# EAGLE board PIR_D205_pan (EAGLE 7.1.0)
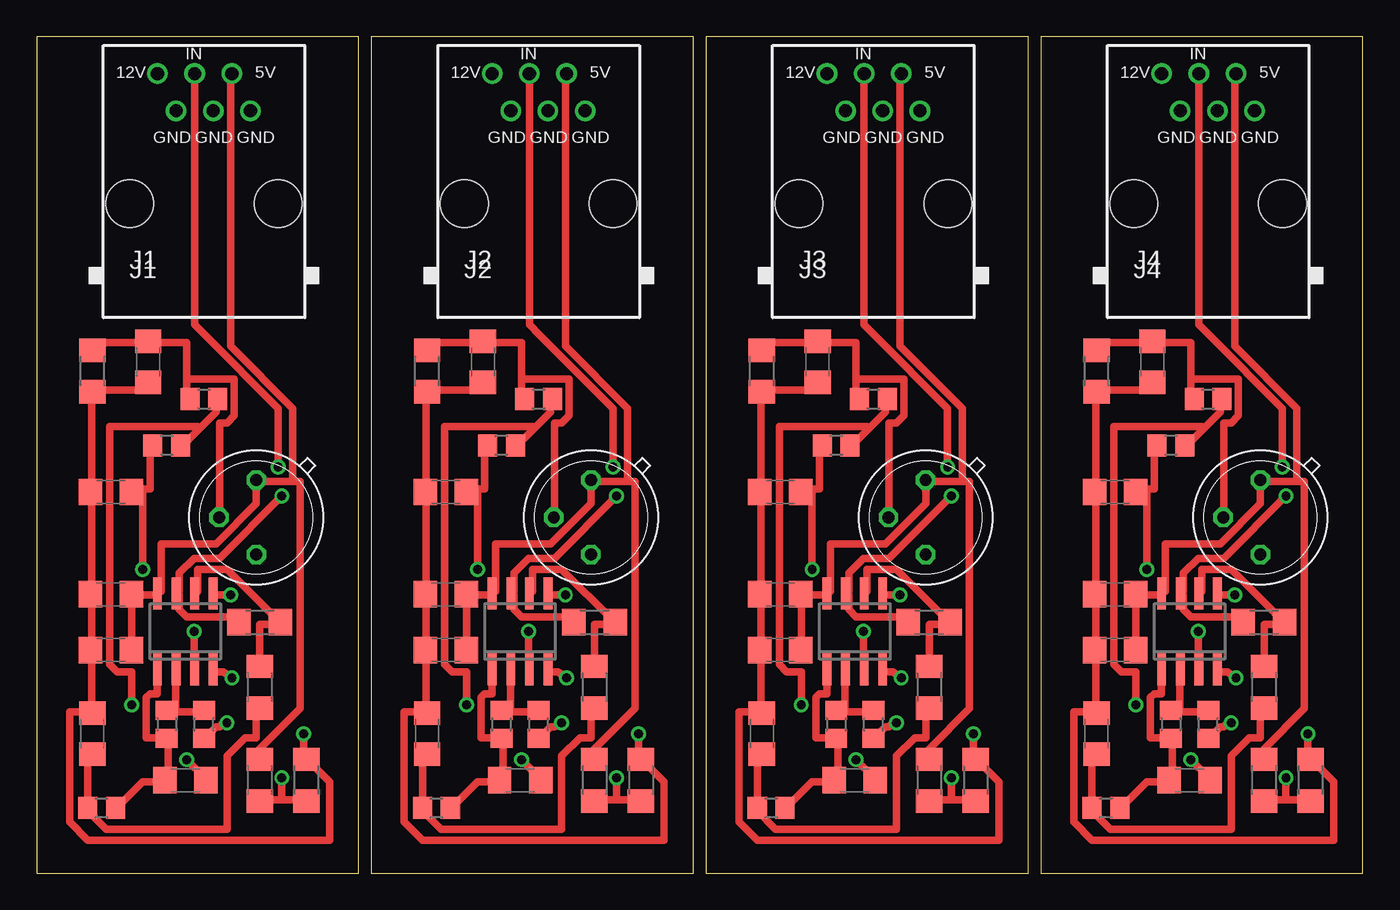
[diagram p0: board, top side]
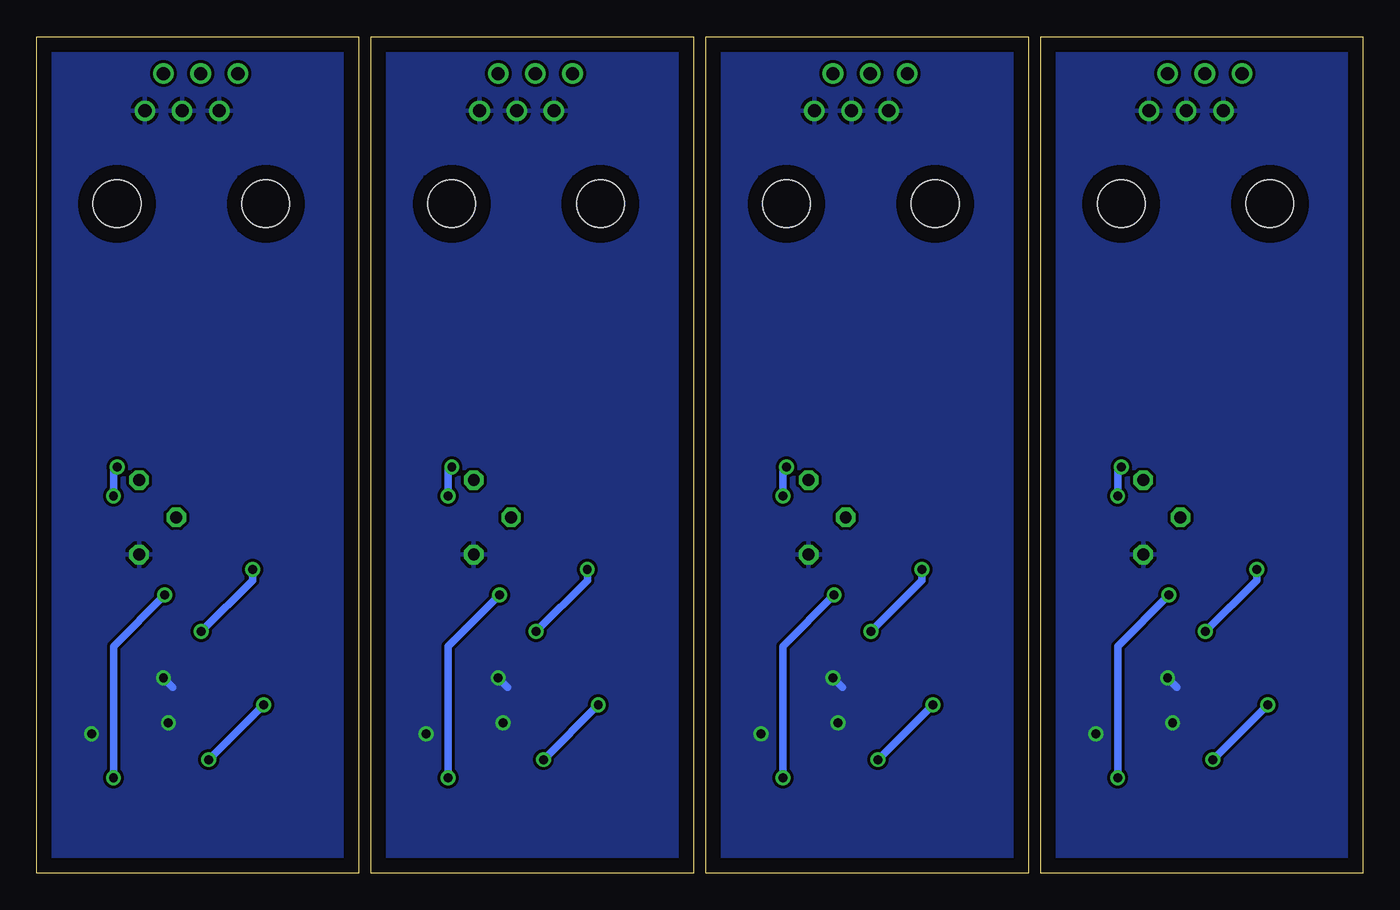
[diagram p1: board, bottom side, seen from below]

Size 90.58 x 57.14 mm. Coordinates in mm from the lower left corner, seen from the top.
Outline: 0,0 22,0 22,57.14 0,57.14 0,0
Outline: 22.86,0 44.86,0 44.86,57.14 22.86,57.14 22.86,0
Outline: 45.72,0 67.72,0 67.72,57.14 45.72,57.14 45.72,0
Outline: 68.58,0 90.58,0 90.58,57.14 68.58,57.14 68.58,0
Copper layers (1*16): Top 0.035mm / dielectric 1.5mm / Bottom 0.035mm
Design rules "default": minimum track width 10mil, minimum drill 24mil, track to track 8mil, track to pad 8mil, pad to pad 8mil, via to via 8mil, smd to smd 8mil, copper to edge 40mil, drill to drill 8mil, minimum pad ring 10mil, minimum via ring 8mil, stop-mask expansion 4mil, vias tented up to drill 0mil, thermal gap 10mil
Net classes: 0 default: width 0.5 mm; 1 PWR: width 0.002 mm, drill 0.002 mm, clearance 0.002 mm

## Footprints (pad centres in the part's own frame; a part is rotated, then mirrored left to right if it is on the bottom)
C1206 = smd 1.6 x 1.8: 1 -1.4,0; 2 1.4,0
SO08 = smd 0.6 x 2.2: 1 -1.905,-2.6; 2 -0.635,-2.6; 3 0.635,-2.6; 4 1.905,-2.6; 5 1.905,2.6; 6 0.635,2.6; 7 -0.635,2.6; 8 -1.905,2.6
RJ12-STRAIGHT-ANALOG = drill 0.9 pad 1.4: +5V 1.905,8.89; +12V -3.175,8.89; GND1 3.175,6.35; GND2 0.635,6.35; GND3 -1.905,6.35; IN -0.635,8.89 | hole 3.251: -5.08,0; 5.08,0
R1206 = smd 1.6 x 1.803: 1 -1.422,0; 2 1.422,0
R0805 = smd 1.3 x 1.5: 1 -0.95,0; 2 0.95,0
TO5 = drill 0.813 octagon: D 0,-2.54; G 0,2.54; S 2.54,0

## Placement (x,y rotation side)
C1  4.7uF  [C1206]  3.81,9.53 90 top
C2  4.7uF  [C1206]  5.08,26.04 180 top
C3  4.7uF  [C1206]  10.16,6.35 180 top
C4  100nF  [C1206]  5.08,15.24 180 top
C5  10uF  [C1206]  5.08,19.05 180 top
C6  100nF  [C1206]  7.62,34.92 270 top
C7  4.7uF  [C1206]  26.67,9.53 90 top
C8  4.7uF  [C1206]  27.94,26.04 180 top
C9  4.7uF  [C1206]  33.02,6.35 180 top
C10  100nF  [C1206]  27.94,15.24 180 top
C11  10uF  [C1206]  27.94,19.05 180 top
C12  100nF  [C1206]  30.48,34.92 270 top
C13  4.7uF  [C1206]  49.53,9.53 90 top
C14  4.7uF  [C1206]  50.8,26.04 180 top
C15  4.7uF  [C1206]  55.88,6.35 180 top
C16  100nF  [C1206]  50.8,15.24 180 top
C17  10uF  [C1206]  50.8,19.05 180 top
C18  100nF  [C1206]  53.34,34.92 270 top
C19  4.7uF  [C1206]  72.39,9.53 90 top
C20  4.7uF  [C1206]  73.66,26.04 180 top
C21  4.7uF  [C1206]  78.74,6.35 180 top
C22  100nF  [C1206]  73.66,15.24 180 top
C23  10uF  [C1206]  73.66,19.05 180 top
C24  100nF  [C1206]  76.2,34.92 270 top
IC1  TL072D  [SO08]  10.16,16.51 0 top
IC2  TL072D  [SO08]  33.02,16.51 0 top
IC3  TL072D  [SO08]  55.88,16.51 0 top
IC4  TL072D  [SO08]  78.74,16.51 0 top
J1  RJ12STRAIGHT-ANALOG  [RJ12-STRAIGHT-ANALOG]  11.43,45.72 0 top
J2  RJ12STRAIGHT-ANALOG  [RJ12-STRAIGHT-ANALOG]  34.29,45.72 0 top
J3  RJ12STRAIGHT-ANALOG  [RJ12-STRAIGHT-ANALOG]  57.15,45.72 0 top
J4  RJ12STRAIGHT-ANALOG  [RJ12-STRAIGHT-ANALOG]  80.01,45.72 0 top
R1  47k  [R1206]  3.81,34.29 270 top
R2  10k  [R0805]  4.45,4.45 180 top
R3  10k  [R0805]  8.89,29.21 180 top
R4  10k  [R0805]  11.43,32.38 0 top
R5  1k  [R0805]  8.89,10.16 270 top
R6  1k  [R0805]  11.43,10.16 90 top
R7  91  [R1206]  15.24,12.7 90 top
R8  390k  [R1206]  15.24,17.14 180 top
R9  200k  [R1206]  15.24,6.35 90 top
R10  51  [R1206]  18.41,6.35 90 top
R11  47k  [R1206]  26.67,34.29 270 top
R12  10k  [R0805]  27.3,4.45 180 top
R13  10k  [R0805]  31.75,29.21 180 top
R14  10k  [R0805]  34.29,32.38 0 top
R15  1k  [R0805]  31.75,10.16 270 top
R16  1k  [R0805]  34.29,10.16 90 top
R17  91  [R1206]  38.1,12.7 90 top
R18  390k  [R1206]  38.1,17.14 180 top
R19  200k  [R1206]  38.1,6.35 90 top
R20  51  [R1206]  41.27,6.35 90 top
R21  47k  [R1206]  49.53,34.29 270 top
R22  10k  [R0805]  50.16,4.45 180 top
R23  10k  [R0805]  54.61,29.21 180 top
R24  10k  [R0805]  57.15,32.38 0 top
R25  1k  [R0805]  54.61,10.16 270 top
R26  1k  [R0805]  57.15,10.16 90 top
R27  91  [R1206]  60.96,12.7 90 top
R28  390k  [R1206]  60.96,17.14 180 top
R29  200k  [R1206]  60.96,6.35 90 top
R30  51  [R1206]  64.14,6.35 90 top
R31  47k  [R1206]  72.39,34.29 270 top
R32  10k  [R0805]  73.03,4.45 180 top
R33  10k  [R0805]  77.47,29.21 180 top
R34  10k  [R0805]  80.01,32.38 0 top
R35  1k  [R0805]  77.47,10.16 270 top
R36  1k  [R0805]  80.01,10.16 90 top
R37  91  [R1206]  83.82,12.7 90 top
R38  390k  [R1206]  83.82,17.14 180 top
R39  200k  [R1206]  83.82,6.35 90 top
R40  51  [R1206]  87,6.35 90 top
U$1  D205B  [TO5]  15,24.3 180 top
U$2  D205B  [TO5]  37.86,24.3 180 top
U$3  D205B  [TO5]  60.72,24.3 180 top
U$4  D205B  [TO5]  83.58,24.3 180 top

## Library data of the parts
C1-C24 R1-R6 R11-R16 R21-R26 R31-R36 = rcl
IC1-IC4 = linear
J1-J4 U$1-U$4 = lpatiny
R7-R10 R17-R20 R27-R30 R37-R40 = resistor; SPICEPREFIX: R

## Nets
GND: C1.2 C2.2 C4.2 C5.2 C6.2 IC1.4 J1.GND1 J1.GND2 J1.GND3 R1.2 R6.1 R10.2 U$1.G
GND1: C7.2 C8.2 C10.2 C11.2 C12.2 IC2.4 J2.GND1 J2.GND2 J2.GND3 R11.2 R16.1 R20.2 U$2.G
GND2: C13.2 C14.2 C16.2 C17.2 C18.2 IC3.4 J3.GND1 J3.GND2 J3.GND3 R21.2 R26.1 R30.2 U$3.G
GND3: C19.2 C20.2 C22.2 C23.2 C24.2 IC4.4 J4.GND1 J4.GND2 J4.GND3 R31.2 R36.1 R40.2 U$4.G
N$1: C6.1 R1.1 R4.1 U$1.S
N$2: C3.2 IC1.1 R2.1 R5.2
N$3: IC1.2 R5.1 R6.2
N$4: C1.1 R2.2 R7.1
N$5: C2.1 IC1.3 R3.2
N$6: C3.1 R3.1 R4.2
N$7: IC1.6 R7.2 R8.1
N$8: IC1.7 J1.IN R8.2
N$9: IC1.5 R9.1 R10.1
N$10: C12.1 R11.1 R14.1 U$2.S
N$11: C9.2 IC2.1 R12.1 R15.2
N$12: IC2.2 R15.1 R16.2
N$13: C7.1 R12.2 R17.1
N$14: C8.1 IC2.3 R13.2
N$15: C9.1 R13.1 R14.2
N$16: IC2.6 R17.2 R18.1
N$17: IC2.7 J2.IN R18.2
N$18: IC2.5 R19.1 R20.1
N$19: C18.1 R21.1 R24.1 U$3.S
N$20: C15.2 IC3.1 R22.1 R25.2
N$21: IC3.2 R25.1 R26.2
N$22: C13.1 R22.2 R27.1
N$23: C14.1 IC3.3 R23.2
N$24: C15.1 R23.1 R24.2
N$25: IC3.6 R27.2 R28.1
N$26: IC3.7 J3.IN R28.2
N$27: IC3.5 R29.1 R30.1
N$28: C24.1 R31.1 R34.1 U$4.S
N$29: C21.2 IC4.1 R32.1 R35.2
N$30: IC4.2 R35.1 R36.2
N$31: C19.1 R32.2 R37.1
N$32: C20.1 IC4.3 R33.2
N$33: C21.1 R33.1 R34.2
N$34: IC4.6 R37.2 R38.1
N$35: IC4.7 J4.IN R38.2
N$36: IC4.5 R39.1 R40.1
VCC: C4.1 C5.1 IC1.8 J1.+5V R9.2 U$1.D
VCC1: C10.1 C11.1 IC2.8 J2.+5V R19.2 U$2.D
VCC2: C16.1 C17.1 IC3.8 J3.+5V R29.2 U$3.D
VCC3: C22.1 C23.1 IC4.8 J4.+5V R39.2 U$4.D

## Tracks (layer width: path | path; a pad name or v marks a point on that pad's centre or on a via)
GND  (via drill 0.6, 0.61)
  Top 0.5: C6.2 7.5,33.5 7,33 4,33 R1.2 3.75,32.75 3.75,26.25 C2.2 3.75,26 3.75,19.25 C5.2 3.75,19 3.75,15.25 C4.2 3.75,15 3.75,11 C1.2 3.5,11 2.25,11 2.25,3.5 3.5,2.25 20,2.25 20,6.25 18.5,7.75 R10.2 18.25,8 v18.25,9.5 | R6.1 11.5,9.25 12.25,10 12.5,10 12.75,10.25 v13,10.25 | IC1.4 12.25,13.75 12.75,13.75 v13.34,13.34
  Bottom 0.5: v13.34,13.34 12.7,12.7
  pour Bottom: 0,57.15 22,57.15 22,0 0,0
GND1  (via drill 0.6, 0.61)
  Top 0.5: C12.2 30.36,33.5 29.86,33 26.86,33 R11.2 26.61,32.75 26.61,26.25 C8.2 26.61,26 26.61,19.25 C11.2 26.61,19 26.61,15.25 C10.2 26.61,15 26.61,11 C7.2 26.36,11 25.11,11 25.11,3.5 26.36,2.25 42.86,2.25 42.86,6.25 41.36,7.75 R20.2 41.11,8 v41.11,9.5 | R16.1 34.36,9.25 35.11,10 35.36,10 35.61,10.25 v35.86,10.25 | IC2.4 35.11,13.75 35.61,13.75 v36.2,13.34
  Bottom 0.5: v36.2,13.34 35.56,12.7
  pour Bottom: 22.86,57.15 44.86,57.15 44.86,0 22.86,0
GND2  (via drill 0.6, 0.61)
  Top 0.5: C18.2 53.22,33.5 52.72,33 49.72,33 R21.2 49.47,32.75 49.47,26.25 C14.2 49.47,26 49.47,19.25 C17.2 49.47,19 49.47,15.25 C16.2 49.47,15 49.47,11 C13.2 49.22,11 47.97,11 47.97,3.5 49.22,2.25 65.72,2.25 65.72,6.25 64.22,7.75 R30.2 63.97,8 v63.97,9.5 | R26.1 57.22,9.25 57.97,10 58.22,10 58.47,10.25 v58.72,10.25 | IC3.4 57.97,13.75 58.47,13.75 v59.05,13.34
  Bottom 0.5: v59.05,13.34 58.42,12.7
  pour Bottom: 45.72,57.15 67.72,57.15 67.72,0 45.72,0
GND3  (via drill 0.6, 0.61)
  Top 0.5: C24.2 76.08,33.5 75.58,33 72.58,33 R31.2 72.33,32.75 72.33,26.25 C20.2 72.33,26 72.33,19.25 C23.2 72.33,19 72.33,15.25 C22.2 72.33,15 72.33,11 C19.2 72.08,11 70.83,11 70.83,3.5 72.08,2.25 88.58,2.25 88.58,6.25 87.08,7.75 R40.2 86.83,8 v86.83,9.5 | R36.1 80.08,9.25 80.83,10 81.08,10 81.33,10.25 v81.58,10.25 | IC4.4 80.83,13.75 81.33,13.75 v81.92,13.34
  Bottom 0.5: v81.92,13.34 81.28,12.7
  pour Bottom: 68.58,57.15 90.58,57.15 90.58,0 68.58,0
N$1
  Top 0.5: 10.25,33.75 10.25,36.25 7.75,36.25 C6.1 7.5,36.25 4.5,36.25 4,35.75 R1.1 | 10.25,33.75 10.25,32.5 R4.1 | 10.25,33.75 13.5,33.75 13.5,31.25 13,30.75 12.5,30.75 12.5,24.5 U$1.S
N$2
  Top 0.5: R2.1 5.5,4.5 7.25,6.25 8.75,6.25 C3.2 9,6.5 9,9 R5.2 8.75,9.25 7.5,9.25 7.5,12 7.75,12.25 8.25,12.25 8.25,13.75 IC1.1
N$3
  Top 0.5: 9.5,11 11.25,11 R6.2 | 9.5,11 9,11 R5.1 9.5,11 | 9.5,11 9.5,13.75 IC1.2
N$4
  Top 0.5: C1.1 3.75,8 3.5,8 3.5,4.5 R2.2 3.5,4.25 4.75,3 13,3 13,8 14.25,9.25 15,9.25 15,11.25 R7.1
N$5  (via drill 0.61)
  Top 0.5: 7.25,26.25 6.5,26.25 C2.1 7.25,26.25 | 7.25,26.25 7.75,26.25 7.75,29 R3.2 | v10.75,16.5 10.75,14 IC1.3 | 7.25,26.25 v7.25,20.75
  Bottom 0.5: v10.75,16.5 7.25,20 v7.25,20.75
N$6  (via drill 0.61)
  Top 0.5: 11.12,30.38 12.25,31.5 12.25,32.25 R4.2 | 11.12,30.38 10,29.25 R3.1 | v10.25,7.75 11.5,6.5 C3.1 | v6.5,11.5 6.5,13.75 5.5,13.75 5,14.25 5,30.5 11,30.5 11.12,30.38
  Bottom 0.5: v6.5,11.5 v10.25,7.75
N$7
  Top 0.5: R7.2 15.25,14.25 15.25,17 16.5,17 R8.1 16.5,17.25 13,20.75 11,20.75 11,19.25 IC1.6
N$8  (via drill 0.61)
  Top 0.5: R8.2 13.75,17.25 13.5,17.5 10.25,17.5 9.75,18 9.75,19 IC1.7 9.75,19.25 9.75,20.5 10.75,21.5 12.5,21.5 v16.75,25.75 | v16.5,27.75 16.5,31.75 11.5,36.75 10.79,37.47 J1.IN 10.75,54.5
  Bottom 0.5: v16.5,27.75 16.75,27.5 v16.75,25.75
N$9  (via drill 0.61)
  Top 0.5: 16.75,5 18.25,5 R10.1 | 16.75,5 15.25,5 R9.1 | v13.25,19 12.25,19 IC1.5 | 16.75,5 v16.75,6.5
  Bottom 0.5: v13.25,19 16.75,15.5 v16.75,6.5
N$10
  Top 0.5: 33.11,33.75 33.11,36.25 30.61,36.25 C12.1 30.36,36.25 27.36,36.25 26.86,35.75 R11.1 | 33.11,33.75 33.11,32.5 R14.1 | 33.11,33.75 36.36,33.75 36.36,31.25 35.86,30.75 35.36,30.75 35.36,24.5 U$2.S
N$11
  Top 0.5: R12.1 28.36,4.5 30.11,6.25 31.61,6.25 C9.2 31.86,6.5 31.86,9 R15.2 31.61,9.25 30.36,9.25 30.36,12 30.61,12.25 31.11,12.25 31.11,13.75 IC2.1
N$12
  Top 0.5: 32.36,11 34.11,11 R16.2 | 32.36,11 31.86,11 R15.1 32.36,11 | 32.36,11 32.36,13.75 IC2.2
N$13
  Top 0.5: C7.1 26.61,8 26.36,8 26.36,4.5 R12.2 26.36,4.25 27.61,3 35.86,3 35.86,8 37.11,9.25 37.86,9.25 37.86,11.25 R17.1
N$14  (via drill 0.61)
  Top 0.5: 30.11,26.25 29.36,26.25 C8.1 30.11,26.25 | 30.11,26.25 30.61,26.25 30.61,29 R13.2 | v33.61,16.5 33.61,14 IC2.3 | 30.11,26.25 v30.11,20.75
  Bottom 0.5: v33.61,16.5 30.11,20 v30.11,20.75
N$15  (via drill 0.61)
  Top 0.5: 33.98,30.38 35.11,31.5 35.11,32.25 R14.2 | 33.98,30.38 32.86,29.25 R13.1 | v33.11,7.75 34.36,6.5 C9.1 | v29.36,11.5 29.36,13.75 28.36,13.75 27.86,14.25 27.86,30.5 33.86,30.5 33.98,30.38
  Bottom 0.5: v29.36,11.5 v33.11,7.75
N$16
  Top 0.5: R17.2 38.11,14.25 38.11,17 39.36,17 R18.1 39.36,17.25 35.86,20.75 33.86,20.75 33.86,19.25 IC2.6
N$17  (via drill 0.61)
  Top 0.5: R18.2 36.61,17.25 36.36,17.5 33.11,17.5 32.61,18 32.61,19 IC2.7 32.61,19.25 32.61,20.5 33.61,21.5 35.36,21.5 v39.61,25.75 | v39.36,27.75 39.36,31.75 34.36,36.75 33.66,37.47 J2.IN 33.61,54.5
  Bottom 0.5: v39.36,27.75 39.61,27.5 v39.61,25.75
N$18  (via drill 0.61)
  Top 0.5: 39.61,5 41.11,5 R20.1 | 39.61,5 38.11,5 R19.1 | v36.11,19 35.11,19 IC2.5 | 39.61,5 v39.61,6.5
  Bottom 0.5: v36.11,19 39.61,15.5 v39.61,6.5
N$19
  Top 0.5: 55.97,33.75 55.97,36.25 53.47,36.25 C18.1 53.22,36.25 50.22,36.25 49.72,35.75 R21.1 | 55.97,33.75 55.97,32.5 R24.1 | 55.97,33.75 59.22,33.75 59.22,31.25 58.72,30.75 58.22,30.75 58.22,24.5 U$3.S
N$20
  Top 0.5: R22.1 51.22,4.5 52.97,6.25 54.47,6.25 C15.2 54.72,6.5 54.72,9 R25.2 54.47,9.25 53.22,9.25 53.22,12 53.47,12.25 53.97,12.25 53.97,13.75 IC3.1
N$21
  Top 0.5: 55.22,11 56.97,11 R26.2 | 55.22,11 54.72,11 R25.1 55.22,11 | 55.22,11 55.22,13.75 IC3.2
N$22
  Top 0.5: C13.1 49.47,8 49.22,8 49.22,4.5 R22.2 49.22,4.25 50.47,3 58.72,3 58.72,8 59.97,9.25 60.72,9.25 60.72,11.25 R27.1
N$23  (via drill 0.61)
  Top 0.5: 52.97,26.25 52.22,26.25 C14.1 52.97,26.25 | 52.97,26.25 53.47,26.25 53.47,29 R23.2 | v56.47,16.5 56.47,14 IC3.3 | 52.97,26.25 v52.97,20.75
  Bottom 0.5: v56.47,16.5 52.97,20 v52.97,20.75
N$24  (via drill 0.61)
  Top 0.5: 56.84,30.38 57.97,31.5 57.97,32.25 R24.2 | 56.84,30.38 55.72,29.25 R23.1 | v55.97,7.75 57.22,6.5 C15.1 | v52.22,11.5 52.22,13.75 51.22,13.75 50.72,14.25 50.72,30.5 56.72,30.5 56.84,30.38
  Bottom 0.5: v52.22,11.5 v55.97,7.75
N$25
  Top 0.5: R27.2 60.97,14.25 60.97,17 62.22,17 R28.1 62.22,17.25 58.72,20.75 56.72,20.75 56.72,19.25 IC3.6
N$26  (via drill 0.61)
  Top 0.5: R28.2 59.47,17.25 59.22,17.5 55.97,17.5 55.47,18 55.47,19 IC3.7 55.47,19.25 55.47,20.5 56.47,21.5 58.22,21.5 v62.47,25.75 | v62.22,27.75 62.22,31.75 57.22,36.75 56.52,37.47 J3.IN 56.47,54.5
  Bottom 0.5: v62.22,27.75 62.47,27.5 v62.47,25.75
N$27  (via drill 0.61)
  Top 0.5: 62.47,5 63.97,5 R30.1 | 62.47,5 60.97,5 R29.1 | v58.97,19 57.97,19 IC3.5 | 62.47,5 v62.47,6.5
  Bottom 0.5: v58.97,19 62.47,15.5 v62.47,6.5
N$28
  Top 0.5: 78.83,33.75 78.83,36.25 76.33,36.25 C24.1 76.08,36.25 73.08,36.25 72.58,35.75 R31.1 | 78.83,33.75 78.83,32.5 R34.1 | 78.83,33.75 82.08,33.75 82.08,31.25 81.58,30.75 81.08,30.75 81.08,24.5 U$4.S
N$29
  Top 0.5: R32.1 74.08,4.5 75.83,6.25 77.33,6.25 C21.2 77.58,6.5 77.58,9 R35.2 77.33,9.25 76.08,9.25 76.08,12 76.33,12.25 76.83,12.25 76.83,13.75 IC4.1
N$30
  Top 0.5: 78.08,11 79.83,11 R36.2 | 78.08,11 77.58,11 R35.1 78.08,11 | 78.08,11 78.08,13.75 IC4.2
N$31
  Top 0.5: C19.1 72.33,8 72.08,8 72.08,4.5 R32.2 72.08,4.25 73.33,3 81.58,3 81.58,8 82.83,9.25 83.58,9.25 83.58,11.25 R37.1
N$32  (via drill 0.61)
  Top 0.5: 75.83,26.25 75.08,26.25 C20.1 75.83,26.25 | 75.83,26.25 76.33,26.25 76.33,29 R33.2 | v79.33,16.5 79.33,14 IC4.3 | 75.83,26.25 v75.83,20.75
  Bottom 0.5: v79.33,16.5 75.83,20 v75.83,20.75
N$33  (via drill 0.61)
  Top 0.5: 79.7,30.38 80.83,31.5 80.83,32.25 R34.2 | 79.7,30.38 78.58,29.25 R33.1 | v78.83,7.75 80.08,6.5 C21.1 | v75.08,11.5 75.08,13.75 74.08,13.75 73.58,14.25 73.58,30.5 79.58,30.5 79.7,30.38
  Bottom 0.5: v75.08,11.5 v78.83,7.75
N$34
  Top 0.5: R37.2 83.83,14.25 83.83,17 85.08,17 R38.1 85.08,17.25 81.58,20.75 79.58,20.75 79.58,19.25 IC4.6
N$35  (via drill 0.61)
  Top 0.5: R38.2 82.33,17.25 82.08,17.5 78.83,17.5 78.33,18 78.33,19 IC4.7 78.33,19.25 78.33,20.5 79.33,21.5 81.08,21.5 v85.33,25.75 | v85.08,27.75 85.08,31.75 80.08,36.75 79.38,37.47 J4.IN 79.33,54.5
  Bottom 0.5: v85.08,27.75 85.33,27.5 v85.33,25.75
N$36  (via drill 0.61)
  Top 0.5: 85.33,5 86.83,5 R40.1 | 85.33,5 83.83,5 R39.1 | v81.83,19 80.83,19 IC4.5 | 85.33,5 v85.33,6.5
  Bottom 0.5: v81.83,19 85.33,15.5 v85.33,6.5
VCC
  Top 0.5: C4.1 6.5,15.25 6.5,19 C5.1 6.75,19 8.25,19 IC1.8 8.5,19.25 8.5,22.5 12.25,22.5 15,25.25 15,26.75 | 15,26.75 17.5,26.75 | 17.5,26.75 18,26.75 18,11.25 15.25,8.5 15.25,8 R9.2 | 17.5,26.75 17.5,31.75 13.25,36 13.25,54.5 J1.+5V | 15,26.75 U$1.D
VCC1
  Top 0.5: C10.1 29.36,15.25 29.36,19 C11.1 29.61,19 31.11,19 IC2.8 31.36,19.25 31.36,22.5 35.11,22.5 37.86,25.25 37.86,26.75 | 37.86,26.75 40.36,26.75 | 40.36,26.75 40.86,26.75 40.86,11.25 38.11,8.5 38.11,8 R19.2 | 40.36,26.75 40.36,31.75 36.11,36 36.11,54.5 J2.+5V | 37.86,26.75 U$2.D
VCC2
  Top 0.5: C16.1 52.22,15.25 52.22,19 C17.1 52.47,19 53.97,19 IC3.8 54.22,19.25 54.22,22.5 57.97,22.5 60.72,25.25 60.72,26.75 | 60.72,26.75 63.22,26.75 | 63.22,26.75 63.72,26.75 63.72,11.25 60.97,8.5 60.97,8 R29.2 | 63.22,26.75 63.22,31.75 58.97,36 58.97,54.5 J3.+5V | 60.72,26.75 U$3.D
VCC3
  Top 0.5: C22.1 75.08,15.25 75.08,19 C23.1 75.33,19 76.83,19 IC4.8 77.08,19.25 77.08,22.5 80.83,22.5 83.58,25.25 83.58,26.75 | 83.58,26.75 86.08,26.75 | 86.08,26.75 86.58,26.75 86.58,11.25 83.83,8.5 83.83,8 R39.2 | 86.08,26.75 86.08,31.75 81.83,36 81.83,54.5 J4.+5V | 83.58,26.75 U$4.D

## Text on the board
_tNames: J1 | J2 | J3 | J4